# EAGLE board Noduino-Open-Plug-V0.8-Produce (EAGLE 6.6.0)
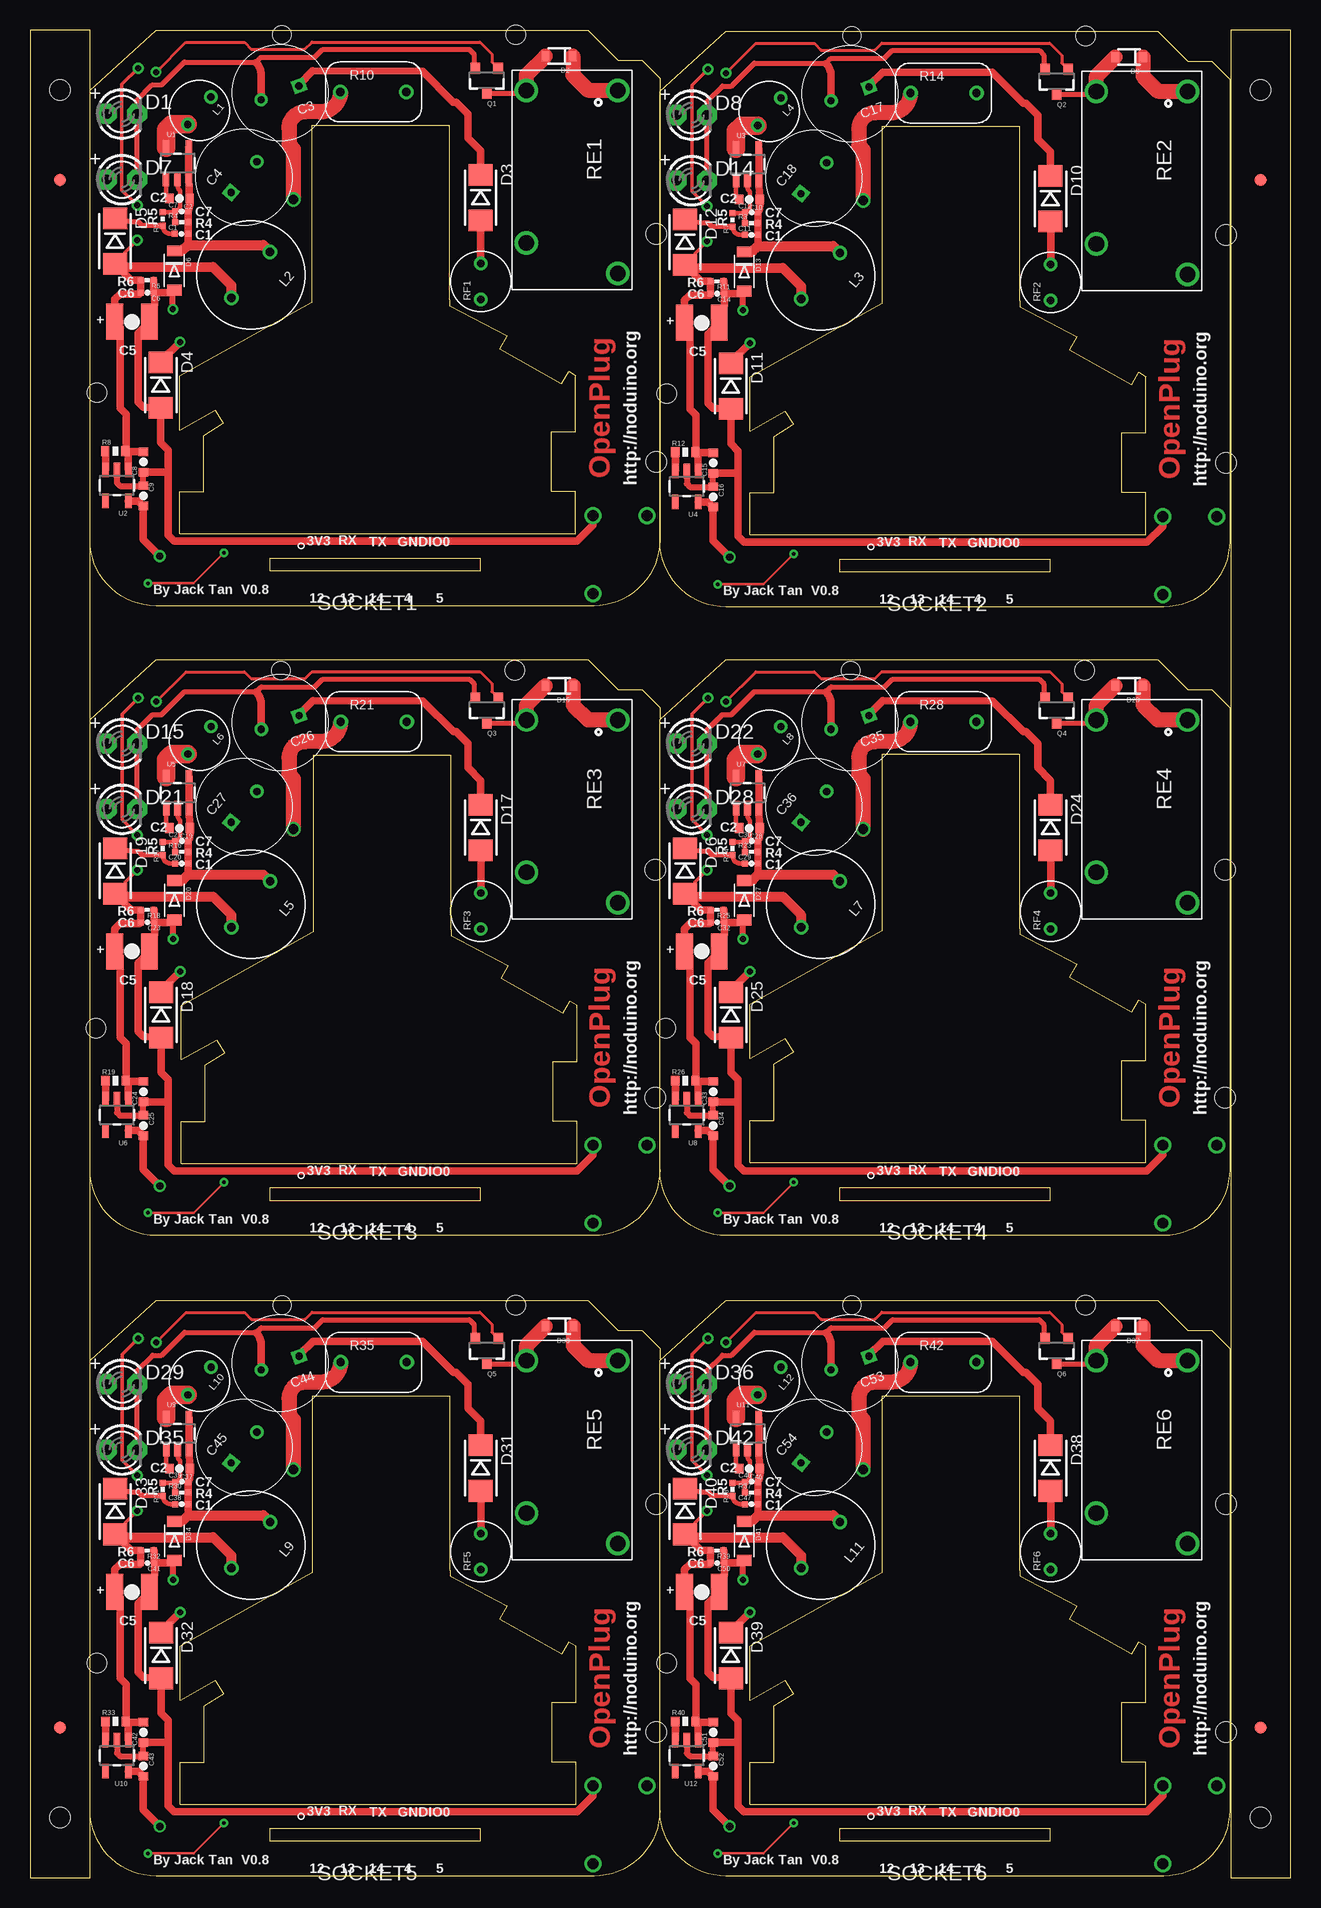
[diagram p0: board, top side]
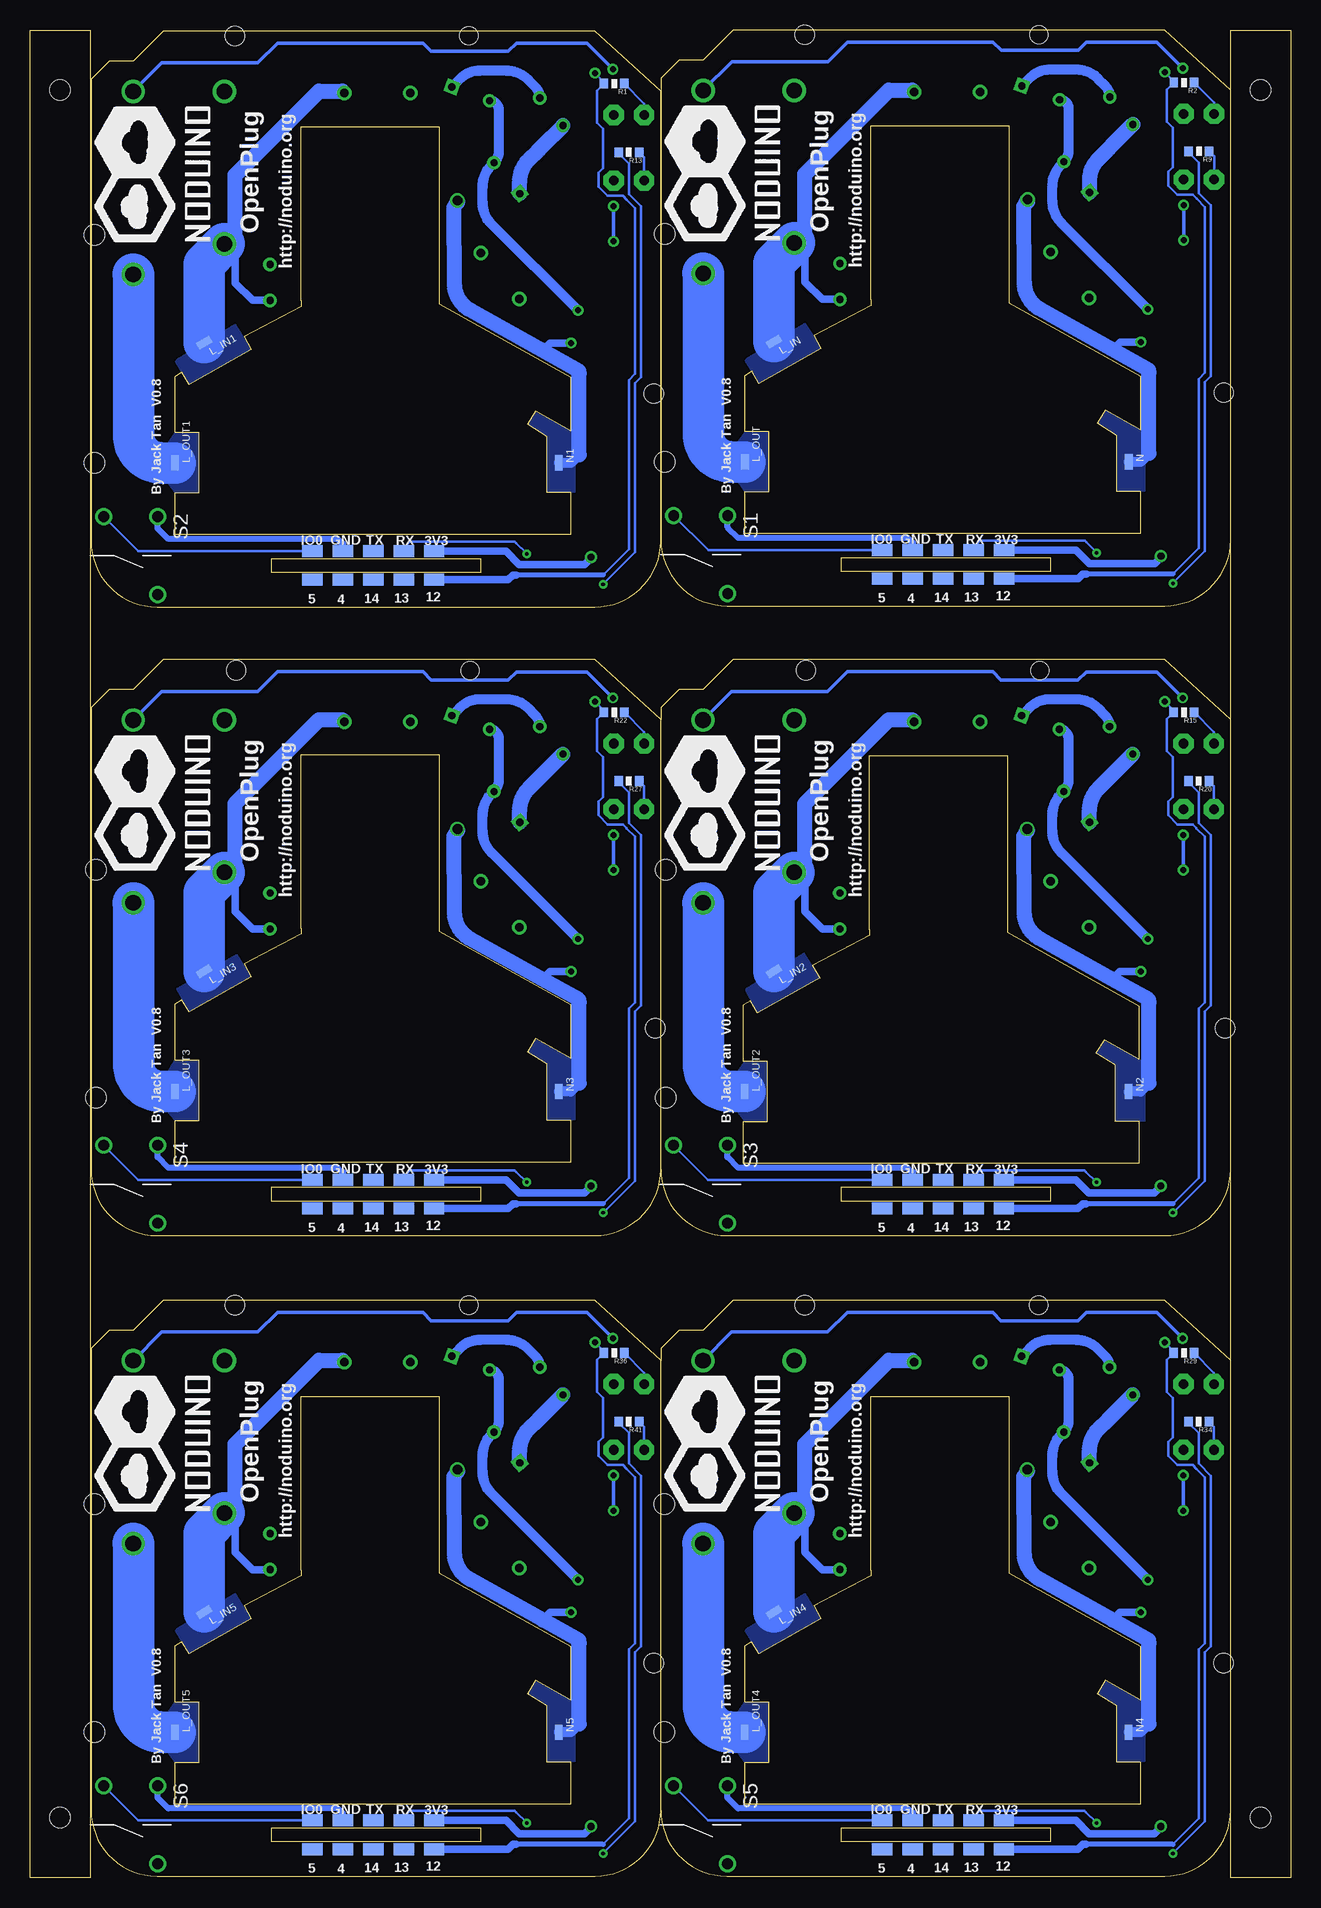
[diagram p1: board, bottom side, seen from below]

Size 105.1 x 154 mm. Coordinates in mm from the lower left corner, seen from the top.
Outline: 52.51,96.52 52.51,97.52 51.01,99.02 49.01,99.02 46.51,101.52 10.51,101.52 5.01,96.52 5.01,59.02 arc90 10.51,53.52 47.01,53.52 arc90 52.51,59.02
Outline: 52.51,59.02 arc90 58.01,53.52 94.51,53.52 arc90 100.01,59.02 100.01,97.52 98.51,99.02 96.51,99.02 94.01,101.52 58.01,101.52 52.51,96.52
Outline: 52.51,59.02 52.51,96.52
Outline: 52.51,43.12 52.51,44.12 51.01,45.62 49.01,45.62 46.51,48.12 10.51,48.12 5.01,43.12 5.01,5.61 arc90 10.51,0.11 47.01,0.11 arc90 52.51,5.61
Outline: 52.51,5.61 arc90 58.01,0.11 94.51,0.11 arc90 100.01,5.61 100.01,44.12 98.51,45.62 96.51,45.62 94.01,48.12 58.01,48.12 52.51,43.12
Outline: 52.51,5.61 52.51,43.12
Outline: 52.5,150 52.5,111.5 arc-90 47,106 10.5,106 arc-90 5,111.5 5,149 10.5,154 46.5,154 49,151.5 51,151.5 52.5,150
Outline: 100.01,149.91 100.01,111.42 arc-90 94.51,105.92 58.01,105.92 arc-90 52.51,111.42 52.51,148.91 58.01,153.91 94.01,153.91 96.51,151.41 98.51,151.41 100.01,149.91
Outline: 0,154 0,0 5,0 5,154 0,154
Outline: 100.1,154 100.1,0 105.1,0 105.1,154 100.1,154
Copper layers (1*16): Top 0.035mm / dielectric 1.5mm / Bottom 0.035mm
Design rules "default": minimum track width 10mil, minimum drill 24mil, track to track 8mil, track to pad 8mil, pad to pad 8mil, via to via 8mil, smd to smd 8mil, copper to edge 40mil, drill to drill 8mil, minimum pad ring 10mil, minimum via ring 8mil, stop-mask expansion 4mil, vias tented up to drill 0mil, thermal gap 10mil
Holes 1.5 mm at 21,153.6 68.51,153.51 20.91,100.61 68.41,100.61 21.01,47.72 68.51,47.72
Holes 1.6 mm at 40.5,153.6 5.58,123.77 88.01,153.51 53.09,123.69 40.41,100.61 5.49,70.79 87.91,100.61 52.99,70.79 40.51,47.72 5.59,17.89 88.01,47.72 53.09,17.89
Holes 1.7 mm at 52.2,137 52.2,118 99.71,136.91 99.71,117.91 52.11,84.02 52.11,65.02 99.61,84.02 99.61,65.02 52.21,31.11 52.21,12.11 99.71,31.11 99.71,12.11 2.5,149 2.5,5 102.6,149 102.6,5
Milling: 150 lines

## Footprints (pad centres in the part's own frame; a part is rotated, then mirrored left to right if it is on the bottom)
0402-CAP = smd 0.5 x 0.5: 1 -0.55,0; 2 0.55,0
0603-CAP = smd 0.7 x 0.8: 1 -0.85,0; 2 0.85,0
CPOL-RADIOA-3.3UF-400V = drill 0.6 square: P$1 -1.675,0 | drill 0.6: P$2 1.675,0
B3528-CAP = smd 1.4 x 3: 1 -1.45,0; 2 1.45,0
LED3MM = drill 0.813 pad 1.676 octagon: A -1.27,0; K 1.27,0
SOD-323 = smd 0.63 x 0.83: 1 -1.15,0; 2 1.15,0
DO-214 = smd 1.8 x 2: A 1.9,0; C -1.9,0
SOD-123 = smd 0.91 x 1.22: A 1.637,0; C -1.637,0
MARK-1MM = smd 1 x 1: P$1 0,0
3-0.5-5 = drill 0.6: P$1 -1.5,0; P$2 1.5,0
INDUCTOR-5-0.5 = drill 0.7: P$1 -2.5,0; P$2 2.5,0
1SMD = smd 1.27 x 0.635: 1 0,0
SOT23-3 = smd 0.8 x 0.9: 1 -0.95,-1; 2 0.95,-1; 3 0,1.1
0603-RES = smd 0.7 x 0.8: 1 -0.85,0; 2 0.85,0
0402-RES = smd 0.5 x 0.5: 1 -0.55,0; 2 0.55,0
07D471K = drill 0.7: P$1 -2.75,0; P$2 2.75,0
HKE-HRS3FN = drill 1.3: 1 0,7.6; 2 0,0; 3 12.7,0; 4 15.24,7.6
SWITCH-TS-037-PLUG = drill 0.9: P$1 -3.25,2.25; P$2 3.25,2.25; P$3 -3.25,-2.25
MOD-PLUG-SOCKET = smd 1.7 x 1 bottom: 1 13.6,-1.14; 2 11.06,-1.14; 3 8.52,-1.14; 4 5.98,-1.14; 5 3.44,-1.14; 6 3.44,1.24; 7 5.98,1.24; 8 8.52,1.24; 9 11.06,1.24; 10 13.6,1.24
SOT23-5 = smd 0.55 x 1.2: 1 -0.95,-1.3; 2 0,-1.3; 3 0.95,-1.3; 4 0.95,1.3; 5 -0.95,1.3

## Placement (x,y rotation side)
C1  220nF  [0402-CAP]  12.63,137.01 0 top
C2  2.2uF  [0603-CAP]  12.46,139.96 180 top
C3  400V/3.3uF  [CPOL-RADIOA-3.3UF-400V]  20.85,148.76 200 top
C4  400V/3.3uF  [CPOL-RADIOA-3.3UF-400V]  17.84,141.73 50 top
C5  100uF/6.3V  [B3528-CAP]  8.51,129.68 180 top
C6  1uF  [0402-CAP]  9.78,132.11 180 top
C7  470pF  [0402-CAP]  12.65,138.88 0 top
C8  4.7uF  [0603-CAP]  9.46,117.99 90 top
C9  4.7uF  [0603-CAP]  9.45,115.17 270 top
C10  2.2uF  [0603-CAP]  59.97,139.88 180 top
C11  220nF  [0402-CAP]  60.14,136.92 0 top
C12  470pF  [0402-CAP]  60.16,138.8 0 top
C13  100uF/6.3V  [B3528-CAP]  56.02,129.59 180 top
C14  1uF  [0402-CAP]  57.29,132.02 180 top
C15  4.7uF  [0603-CAP]  56.97,117.9 90 top
C16  4.7uF  [0603-CAP]  56.96,115.09 270 top
C17  400V/3.3uF  [CPOL-RADIOA-3.3UF-400V]  68.36,148.68 200 top
C18  400V/3.3uF  [CPOL-RADIOA-3.3UF-400V]  65.35,141.65 50 top
C19  2.2uF  [0603-CAP]  12.47,87.48 180 top
C20  220nF  [0402-CAP]  12.64,84.52 0 top
C21  470pF  [0402-CAP]  12.66,86.4 0 top
C22  100uF/6.3V  [B3528-CAP]  8.52,77.19 180 top
C23  1uF  [0402-CAP]  9.79,79.62 180 top
C24  4.7uF  [0603-CAP]  9.47,65.5 90 top
C25  4.7uF  [0603-CAP]  9.46,62.69 270 top
C26  400V/3.3uF  [CPOL-RADIOA-3.3UF-400V]  20.86,96.28 200 top
C27  400V/3.3uF  [CPOL-RADIOA-3.3UF-400V]  17.85,89.25 50 top
C28  2.2uF  [0603-CAP]  59.97,87.48 180 top
C29  220nF  [0402-CAP]  60.14,84.52 0 top
C30  470pF  [0402-CAP]  60.16,86.4 0 top
C31  100uF/6.3V  [B3528-CAP]  56.02,77.19 180 top
C32  1uF  [0402-CAP]  57.29,79.62 180 top
C33  4.7uF  [0603-CAP]  56.97,65.5 90 top
C34  4.7uF  [0603-CAP]  56.96,62.69 270 top
C35  400V/3.3uF  [CPOL-RADIOA-3.3UF-400V]  68.36,96.28 200 top
C36  400V/3.3uF  [CPOL-RADIOA-3.3UF-400V]  65.35,89.25 50 top
C37  2.2uF  [0603-CAP]  12.47,34.08 180 top
C38  220nF  [0402-CAP]  12.64,31.12 0 top
C39  470pF  [0402-CAP]  12.66,33 0 top
C40  100uF/6.3V  [B3528-CAP]  8.52,23.79 180 top
C41  1uF  [0402-CAP]  9.79,26.22 180 top
C42  4.7uF  [0603-CAP]  9.47,12.1 90 top
C43  4.7uF  [0603-CAP]  9.46,9.29 270 top
C44  400V/3.3uF  [CPOL-RADIOA-3.3UF-400V]  20.86,42.88 200 top
C45  400V/3.3uF  [CPOL-RADIOA-3.3UF-400V]  17.85,35.85 50 top
C46  2.2uF  [0603-CAP]  59.97,34.08 180 top
C47  220nF  [0402-CAP]  60.14,31.12 0 top
C48  470pF  [0402-CAP]  60.16,33 0 top
C49  100uF/6.3V  [B3528-CAP]  56.02,23.79 180 top
C50  1uF  [0402-CAP]  57.29,26.22 180 top
C51  4.7uF  [0603-CAP]  56.97,12.1 90 top
C52  4.7uF  [0603-CAP]  56.96,9.29 270 top
C53  400V/3.3uF  [CPOL-RADIOA-3.3UF-400V]  68.36,42.88 200 top
C54  400V/3.3uF  [CPOL-RADIOA-3.3UF-400V]  65.35,35.85 50 top
D1  RED  [LED3MM]  7.66,147.01 0 top
D2  1N4007  [SOD-323]  44.12,151.83 180 top
D3  1N4007  [DO-214]  37.56,140.01 270 top
D4  1N4007  [DO-214]  10.91,124.39 270 top
D5  1N4007  [DO-214]  7.09,136.39 270 top
D6  T7  [SOD-123]  12.03,133.95 270 top
D7  RED  [LED3MM]  7.66,141.54 0 top
D8  RED  [LED3MM]  55.17,146.92 0 top
D9  1N4007  [SOD-323]  91.63,151.75 180 top
D10  1N4007  [DO-214]  85.07,139.93 270 top
D11  1N4007  [DO-214]  58.42,124.3 270 top
D12  1N4007  [DO-214]  54.6,136.31 270 top
D13  T7  [SOD-123]  59.54,133.86 270 top
D14  RED  [LED3MM]  55.17,141.45 0 top
D15  RED  [LED3MM]  7.67,94.52 0 top
D16  1N4007  [SOD-323]  44.13,99.35 180 top
D17  1N4007  [DO-214]  37.57,87.53 270 top
D18  1N4007  [DO-214]  10.92,71.9 270 top
D19  1N4007  [DO-214]  7.1,83.91 270 top
D20  T7  [SOD-123]  12.04,81.46 270 top
D21  RED  [LED3MM]  7.67,89.05 0 top
D22  RED  [LED3MM]  55.17,94.52 0 top
D23  1N4007  [SOD-323]  91.63,99.35 180 top
D24  1N4007  [DO-214]  85.07,87.53 270 top
D25  1N4007  [DO-214]  58.42,71.9 270 top
D26  1N4007  [DO-214]  54.6,83.91 270 top
D27  T7  [SOD-123]  59.54,81.46 270 top
D28  RED  [LED3MM]  55.17,89.05 0 top
D29  RED  [LED3MM]  7.67,41.12 0 top
D30  1N4007  [SOD-323]  44.13,45.95 180 top
D31  1N4007  [DO-214]  37.57,34.13 270 top
D32  1N4007  [DO-214]  10.92,18.5 270 top
D33  1N4007  [DO-214]  7.1,30.51 270 top
D34  T7  [SOD-123]  12.04,28.06 270 top
D35  RED  [LED3MM]  7.67,35.65 0 top
D36  RED  [LED3MM]  55.17,41.12 0 top
D37  1N4007  [SOD-323]  91.63,45.95 180 top
D38  1N4007  [DO-214]  85.07,34.13 270 top
D39  1N4007  [DO-214]  58.42,18.5 270 top
D40  1N4007  [DO-214]  54.6,30.51 270 top
D41  T7  [SOD-123]  59.54,28.06 270 top
D42  RED  [LED3MM]  55.17,35.65 0 top
E$1  [MARK-1MM]  2.5,141.5 0 top
E$2  [MARK-1MM]  2.5,12.5 0 top
E$3  [MARK-1MM]  102.6,141.5 0 top
E$4  [MARK-1MM]  102.6,12.5 0 top
L1  1mH  [3-0.5-5]  14.12,147.27 230 top
L2  1mH  [INDUCTOR-5-0.5]  18.4,133.6 230 top
L3  1mH  [INDUCTOR-5-0.5]  65.91,133.51 230 top
L4  1mH  [3-0.5-5]  61.63,147.19 230 top
L5  1mH  [INDUCTOR-5-0.5]  18.41,81.11 230 top
L6  1mH  [3-0.5-5]  14.13,94.79 230 top
L7  1mH  [INDUCTOR-5-0.5]  65.91,81.11 230 top
L8  1mH  [3-0.5-5]  61.63,94.79 230 top
L9  1mH  [INDUCTOR-5-0.5]  18.41,27.71 230 top
L10  1mH  [3-0.5-5]  14.13,41.39 230 top
L11  1mH  [INDUCTOR-5-0.5]  65.91,27.71 230 top
L12  1mH  [3-0.5-5]  61.63,41.39 230 top
L_IN  TESTPAD50/25  [1SMD]  43.06,128.02 31 bottom
L_IN1  TESTPAD50/25  [1SMD]  90.57,127.93 31 bottom
L_IN2  TESTPAD50/25  [1SMD]  43.07,75.53 31 bottom
L_IN3  TESTPAD50/25  [1SMD]  90.57,75.53 31 bottom
L_IN4  TESTPAD50/25  [1SMD]  43.07,22.13 31 bottom
L_IN5  TESTPAD50/25  [1SMD]  90.57,22.13 31 bottom
L_OUT  TESTPAD50/25  [1SMD]  45.5,118 90 bottom
L_OUT1  TESTPAD50/25  [1SMD]  93.01,117.91 90 bottom
L_OUT2  TESTPAD50/25  [1SMD]  45.51,65.52 90 bottom
L_OUT3  TESTPAD50/25  [1SMD]  93.01,65.52 90 bottom
L_OUT4  TESTPAD50/25  [1SMD]  45.51,12.11 90 bottom
L_OUT5  TESTPAD50/25  [1SMD]  93.01,12.11 90 bottom
N  TESTPAD50/25  [1SMD]  13.5,118 90 bottom
N1  TESTPAD50/25  [1SMD]  61.01,117.91 90 bottom
N2  TESTPAD50/25  [1SMD]  13.51,65.52 90 bottom
N3  TESTPAD50/25  [1SMD]  61.01,65.52 90 bottom
N4  TESTPAD50/25  [1SMD]  13.51,12.11 90 bottom
N5  TESTPAD50/25  [1SMD]  61.01,12.11 90 bottom
Q1  SI2302  [SOT23-3]  38.07,149.81 180 top
Q2  SI2302  [SOT23-3]  85.58,149.73 180 top
Q3  SI2302  [SOT23-3]  38.08,97.33 180 top
Q4  SI2302  [SOT23-3]  85.58,97.33 180 top
Q5  SI2302  [SOT23-3]  38.08,43.93 180 top
Q6  SI2302  [SOT23-3]  85.58,43.93 180 top
R1  1K  [0603-RES]  56.41,149.53 180 bottom
R2  1K  [0603-RES]  8.9,149.62 180 bottom
R3  4.99K  [0402-RES]  60.16,137.9 0 top
R4  4.99K  [0402-RES]  12.65,137.98 0 top
R5  4.99K  [0402-RES]  11.06,138.25 90 top
R6  680R  [0402-RES]  9.77,133.14 180 top
R7  4.99K  [0402-RES]  58.57,138.16 90 top
R8  10K  [0603-RES]  7.12,118.9 0 top
R9  1K  [0603-RES]  7.66,143.88 180 bottom
R10  07D471K  [07D471K]  28.64,148.83 0 top
R11  680R  [0402-RES]  57.28,133.06 180 top
R12  10K  [0603-RES]  54.63,118.81 0 top
R13  1K  [0603-RES]  55.17,143.8 180 bottom
R14  07D471K  [07D471K]  76.15,148.75 0 top
R15  1K  [0603-RES]  8.91,97.13 180 bottom
R16  4.99K  [0402-RES]  12.66,85.5 0 top
R17  4.99K  [0402-RES]  11.07,85.76 90 top
R18  680R  [0402-RES]  9.78,80.66 180 top
R19  10K  [0603-RES]  7.13,66.41 0 top
R20  1K  [0603-RES]  7.67,91.4 180 bottom
R21  07D471K  [07D471K]  28.65,96.35 0 top
R22  1K  [0603-RES]  56.41,97.13 180 bottom
R23  4.99K  [0402-RES]  60.16,85.5 0 top
R24  4.99K  [0402-RES]  58.57,85.76 90 top
R25  680R  [0402-RES]  57.28,80.66 180 top
R26  10K  [0603-RES]  54.63,66.41 0 top
R27  1K  [0603-RES]  55.17,91.4 180 bottom
R28  07D471K  [07D471K]  76.15,96.35 0 top
R29  1K  [0603-RES]  8.91,43.73 180 bottom
R30  4.99K  [0402-RES]  12.66,32.1 0 top
R31  4.99K  [0402-RES]  11.07,32.36 90 top
R32  680R  [0402-RES]  9.78,27.26 180 top
R33  10K  [0603-RES]  7.13,13.01 0 top
R34  1K  [0603-RES]  7.67,38 180 bottom
R35  07D471K  [07D471K]  28.65,42.95 0 top
R36  1K  [0603-RES]  56.41,43.73 180 bottom
R37  4.99K  [0402-RES]  60.16,32.1 0 top
R38  4.99K  [0402-RES]  58.57,32.36 90 top
R39  680R  [0402-RES]  57.28,27.26 180 top
R40  10K  [0603-RES]  54.63,13.01 0 top
R41  1K  [0603-RES]  55.17,38 180 bottom
R42  07D471K  [07D471K]  76.15,42.95 0 top
RE1  HRS3FNH  [HKE-HRS3FN]  41.39,148.96 270 top
RE2  HRS3FNH  [HKE-HRS3FN]  88.9,148.88 270 top
RE3  HRS3FNH  [HKE-HRS3FN]  41.4,96.48 270 top
RE4  HRS3FNH  [HKE-HRS3FN]  88.9,96.48 270 top
RE5  HRS3FNH  [HKE-HRS3FN]  41.4,43.08 270 top
RE6  HRS3FNH  [HKE-HRS3FN]  88.9,43.08 270 top
RF1  10R  [3-0.5-5]  37.58,133.04 90 top
RF2  10R  [3-0.5-5]  85.09,132.96 90 top
RF3  10R  [3-0.5-5]  37.59,80.56 90 top
RF4  10R  [3-0.5-5]  85.09,80.56 90 top
RF5  10R  [3-0.5-5]  37.59,27.16 90 top
RF6  10R  [3-0.5-5]  85.09,27.16 90 top
S1  [SWITCH-TS-037-PLUG]  49.19,110.28 270 bottom
S2  [SWITCH-TS-037-PLUG]  96.7,110.19 270 bottom
S3  [SWITCH-TS-037-PLUG]  49.2,57.79 270 bottom
S4  [SWITCH-TS-037-PLUG]  96.7,57.79 270 bottom
S5  [SWITCH-TS-037-PLUG]  49.2,4.39 270 bottom
S6  [SWITCH-TS-037-PLUG]  96.7,4.39 270 bottom
SOCKET1  [MOD-PLUG-SOCKET]  37.5,109.5 180 top
SOCKET2  [MOD-PLUG-SOCKET]  85.01,109.42 180 top
SOCKET3  [MOD-PLUG-SOCKET]  37.51,57.02 180 top
SOCKET4  [MOD-PLUG-SOCKET]  85.01,57.02 180 top
SOCKET5  [MOD-PLUG-SOCKET]  37.51,3.61 180 top
SOCKET6  [MOD-PLUG-SOCKET]  85.01,3.61 180 top
U1  F7298  [SOT23-5]  12.3,142.89 0 top
U2  AP2112  [SOT23-5]  7.24,116.05 180 top
U3  F7298  [SOT23-5]  59.81,142.81 0 top
U4  AP2112  [SOT23-5]  54.75,115.96 180 top
U5  F7298  [SOT23-5]  12.31,90.41 0 top
U6  AP2112  [SOT23-5]  7.25,63.56 180 top
U7  F7298  [SOT23-5]  59.81,90.41 0 top
U8  AP2112  [SOT23-5]  54.75,63.56 180 top
U9  F7298  [SOT23-5]  12.31,37.01 0 top
U10  AP2112  [SOT23-5]  7.25,10.16 180 top
U11  F7298  [SOT23-5]  59.81,37.01 0 top
U12  AP2112  [SOT23-5]  54.75,10.16 180 top
U$1  NODUINO-LOGO-ALL  [NODUINO-ALL-1]  41.92,136.06 90 bottom
U$2  NODUINO-LOGO-ALL  [NODUINO-ALL-1]  89.43,135.97 90 bottom
U$3  NODUINO-LOGO-ALL  [NODUINO-ALL-1]  41.93,83.57 90 bottom
U$4  NODUINO-LOGO-ALL  [NODUINO-ALL-1]  89.43,83.57 90 bottom
U$5  NODUINO-LOGO-ALL  [NODUINO-ALL-1]  41.93,30.17 90 bottom
U$6  NODUINO-LOGO-ALL  [NODUINO-ALL-1]  89.43,30.17 90 bottom

## Library data of the parts
C1-C54 D2-D6 D9-D13 D16-D20 D23-D27 D30-D34 D37-D41 E$1-E$4 L1-L12 L_IN L_IN1-L_IN5 L_OUT L_OUT1-L_OUT5 N N1-N5 Q1-Q6 R1-R42 RE1-RE6 RF1-RF6 S1-S6 SOCKET1-SOCKET6 U1-U12 U$1-U$6 = ehl
D1 D7 D8 D14 D15 D21 D22 D28 D29 D35 D36 D42 = adafruit

## Nets
3V1: C16.2 SOCKET2.1 U4.5
3V2: C25.2 SOCKET3.1 U6.5
3V3: C9.2 SOCKET1.1 U2.5
3V4: C34.2 SOCKET4.1 U8.5
3V5: C43.2 SOCKET5.1 U10.5
3V6: C52.2 SOCKET6.1 U12.5
5V: C5.2 C6.2 C8.2 D2.1 D5.A L2.P$2 R6.2 R8.2 RE1.1 U2.1
5V1: C13.2 C14.2 C15.2 D9.1 D12.A L3.P$2 R11.2 R12.2 RE2.1 U4.1
5V2: C22.2 C23.2 C24.2 D16.1 D19.A L5.P$2 R18.2 R19.2 RE3.1 U6.1
5V3: C31.2 C32.2 C33.2 D23.1 D26.A L7.P$2 R25.2 R26.2 RE4.1 U8.1
5V4: C40.2 C41.2 C42.2 D30.1 D33.A L9.P$2 R32.2 R33.2 RE5.1 U10.1
5V5: C49.2 C50.2 C51.2 D37.1 D40.A L11.P$2 R39.2 R40.2 RE6.1 U12.1
GND: C3.P$2 C4.P$2 C5.1 C6.1 C8.1 C9.1 D1.K D4.A D6.A D7.K Q1.2 R6.1 S1.P$1 SOCKET1.4 U2.2
GND1: C13.1 C14.1 C15.1 C16.1 C17.P$2 C18.P$2 D8.K D11.A D13.A D14.K Q2.2 R11.1 S2.P$1 SOCKET2.4 U4.2
GND2: C22.1 C23.1 C24.1 C25.1 C26.P$2 C27.P$2 D15.K D18.A D20.A D21.K Q3.2 R18.1 S3.P$1 SOCKET3.4 U6.2
GND3: C31.1 C32.1 C33.1 C34.1 C35.P$2 C36.P$2 D22.K D25.A D27.A D28.K Q4.2 R25.1 S4.P$1 SOCKET4.4 U8.2
GND4: C40.1 C41.1 C42.1 C43.1 C44.P$2 C45.P$2 D29.K D32.A D34.A D35.K Q5.2 R32.1 S5.P$1 SOCKET5.4 U10.2
GND5: C49.1 C50.1 C51.1 C52.1 C53.P$2 C54.P$2 D36.K D39.A D41.A D42.K Q6.2 R39.1 S6.P$1 SOCKET6.4 U12.2
GPIO0: S1.P$3 SOCKET1.5
GPIO1: R13.2 SOCKET2.2
GPIO2: S2.P$3 SOCKET2.5
GPIO3: R9.2 SOCKET1.2
GPIO4: R20.2 SOCKET3.2
GPIO5: S3.P$3 SOCKET3.5
GPIO6: R27.2 SOCKET4.2
GPIO7: S4.P$3 SOCKET4.5
GPIO8: R34.2 SOCKET5.2
GPIO9: S5.P$3 SOCKET5.5
GPIO10: R41.2 SOCKET6.2
GPIO11: S6.P$3 SOCKET6.5
L_IN: L_IN.1 R10.P$2 RE1.3 RF1.P$1
L_IN1: L_IN1.1 R14.P$2 RE2.3 RF2.P$1
L_IN2: L_IN2.1 R21.P$2 RE3.3 RF3.P$1
L_IN3: L_IN3.1 R28.P$2 RE4.3 RF4.P$1
L_IN4: L_IN4.1 R35.P$2 RE5.3 RF5.P$1
L_IN5: L_IN5.1 R42.P$2 RE6.3 RF6.P$1
L_OUT: L_OUT.1 RE1.4
L_OUT1: L_OUT1.1 RE2.4
L_OUT2: L_OUT2.1 RE3.4
L_OUT3: L_OUT3.1 RE4.4
L_OUT4: L_OUT4.1 RE5.4
L_OUT5: L_OUT5.1 RE6.4
N: D4.C N.1 R10.P$1
N1: D11.C N1.1 R14.P$1
N2: D18.C N2.1 R21.P$1
N3: D25.C N3.1 R28.P$1
N4: D32.C N4.1 R35.P$1
N5: D39.C N5.1 R42.P$1
N$1: D8.A R1.1
N$2: D2.2 Q1.3 RE1.2
N$3: C3.P$1 D3.C L1.P$1
N$4: D1.A R2.1
N$5: C4.P$1 L1.P$2 U1.5
N$6: C1.2 C2.1 C7.2 D6.C L2.P$1 R4.2 U1.3 U1.4
N$7: D3.A RF1.P$2
N$8: D9.2 Q2.3 RE2.2
N$9: C17.P$1 D10.C L4.P$1
N$10: C2.2 U1.1
N$11: C7.1 R4.1 R5.2 U1.2
N$12: C1.1 D5.C R5.1
N$13: R8.1 U2.3
N$14: D7.A R9.1
N$15: C18.P$1 L4.P$2 U3.5
N$16: C10.1 C11.2 C12.2 D13.C L3.P$1 R3.2 U3.3 U3.4
N$17: D10.A RF2.P$2
N$18: C10.2 U3.1
N$19: C12.1 R3.1 R7.2 U3.2
N$20: C11.1 D12.C R7.1
N$21: R12.1 U4.3
N$22: D14.A R13.1
N$23: D15.A R15.1
N$24: D16.2 Q3.3 RE3.2
N$25: C26.P$1 D17.C L6.P$1
N$26: C27.P$1 L6.P$2 U5.5
N$27: C19.1 C20.2 C21.2 D20.C L5.P$1 R16.2 U5.3 U5.4
N$28: D17.A RF3.P$2
N$29: C19.2 U5.1
N$30: C21.1 R16.1 R17.2 U5.2
N$31: C20.1 D19.C R17.1
N$32: R19.1 U6.3
N$33: D21.A R20.1
N$34: D22.A R22.1
N$35: D23.2 Q4.3 RE4.2
N$36: C35.P$1 D24.C L8.P$1
N$37: C36.P$1 L8.P$2 U7.5
N$38: C28.1 C29.2 C30.2 D27.C L7.P$1 R23.2 U7.3 U7.4
N$39: D24.A RF4.P$2
N$40: C28.2 U7.1
N$41: C30.1 R23.1 R24.2 U7.2
N$42: C29.1 D26.C R24.1
N$43: R26.1 U8.3
N$44: D28.A R27.1
N$45: D29.A R29.1
N$46: D30.2 Q5.3 RE5.2
N$47: C44.P$1 D31.C L10.P$1
N$48: C45.P$1 L10.P$2 U9.5
N$49: C37.1 C38.2 C39.2 D34.C L9.P$1 R30.2 U9.3 U9.4
N$50: D31.A RF5.P$2
N$51: C37.2 U9.1
N$52: C39.1 R30.1 R31.2 U9.2
N$53: C38.1 D33.C R31.1
N$54: R33.1 U10.3
N$55: D35.A R34.1
N$56: D36.A R36.1
N$57: D37.2 Q6.3 RE6.2
N$58: C53.P$1 D38.C L12.P$1
N$59: C54.P$1 L12.P$2 U11.5
N$60: C46.1 C47.2 C48.2 D41.C L11.P$1 R37.2 U11.3 U11.4
N$61: D38.A RF6.P$2
N$62: C46.2 U11.1
N$63: C48.1 R37.1 R38.2 U11.2
N$64: C47.1 D40.C R38.1
N$65: R40.1 U12.3
N$66: D42.A R41.1
RELAY: Q1.1 R2.2 SOCKET1.10
RELAY1: Q2.1 R1.2 SOCKET2.10
RELAY2: Q3.1 R15.2 SOCKET3.10
RELAY3: Q4.1 R22.2 SOCKET4.10
RELAY4: Q5.1 R29.2 SOCKET5.10
RELAY5: Q6.1 R36.2 SOCKET6.10
TX: SOCKET1.3
TX1: SOCKET2.3
TX2: SOCKET3.3
TX3: SOCKET4.3
TX4: SOCKET5.3
TX5: SOCKET6.3

## Tracks (layer width: path | path; a pad name or v marks a point on that pad's centre or on a via)
3V1  (via drill 0.6)
  Top 0.61: U4.5 56.53,114.66 C16.2 56.96,111.43 v58.33,110.06
  Bottom 0.61: v58.33,110.06 58.33,109.98 58.85,109.45 64.31,109.45 65.41,110.56 SOCKET2.1
3V2  (via drill 0.6)
  Top 0.61: U6.5 9.03,62.26 C25.2 9.46,59.03 v10.83,57.66
  Bottom 0.61: v10.83,57.66 10.83,57.58 11.35,57.05 16.81,57.05 17.91,58.16 SOCKET3.1
3V3  (via drill 0.6)
  Top 0.61: U2.5 9.02,114.75 C9.2 9.45,111.51 v10.82,110.14
  Bottom 0.61: v10.82,110.14 10.82,110.07 11.34,109.54 16.8,109.54 17.9,110.64 SOCKET1.1
3V4  (via drill 0.6)
  Top 0.61: U8.5 56.53,62.26 C34.2 56.96,59.03 v58.33,57.66
  Bottom 0.61: v58.33,57.66 58.33,57.58 58.85,57.05 64.31,57.05 65.41,58.16 SOCKET4.1
3V5  (via drill 0.6)
  Top 0.61: U10.5 9.03,8.86 C43.2 9.46,5.63 v10.83,4.26
  Bottom 0.61: v10.83,4.26 10.83,4.18 11.35,3.66 16.81,3.66 17.91,4.75 SOCKET5.1
3V6  (via drill 0.6)
  Top 0.61: U12.5 56.53,8.86 C52.2 56.96,5.63 v58.33,4.26
  Bottom 0.61: v58.33,4.26 58.33,4.18 58.85,3.66 64.31,3.66 65.41,4.75 SOCKET6.1
5V  (via drill 0.5)
  Top 0.305: D5.A 7.15,134.43 7.4,134.25 7.91,134.69 7.91,135.45 v8.93,136.46 | v8.93,139.39 7.66,140.66 7.66,149.47 v9.01,150.81
  Top 0.61: U2.1 8.2,118.67 R8.2 | C8.2 8.03,118.84 R8.2 | R8.2 8,118.93 8,122 7.5,122.5 7.5,129.24 C5.2 7.05,131.56 7.5,132 9.12,132 C6.2 9.23,133.13 R6.2 8.44,133.14 D5.A
  Top 0.813: L2.P$2 16.8,132.7 15.26,134.24 7.4,134.25
  Top 1.27: D2.1 45.27,150.23 46.5,149 48.95,149 RE1.1
  Bottom 0.305: RE1.1 46.6,151.35 38.59,151.35 36.94,153 24.84,153 24.14,152.3 17.72,152.3 17.05,152.97 11.16,152.97 v9.01,150.81 | v8.93,136.46 v8.93,139.39
5V1  (via drill 0.5)
  Top 0.305: D12.A 54.66,134.35 54.91,134.17 55.42,134.6 55.42,135.36 v56.44,136.38 | v56.44,139.31 55.17,140.58 55.17,149.38 v56.52,150.73
  Top 0.61: U4.1 55.7,118.59 R12.2 | C15.2 55.54,118.75 R12.2 | R12.2 55.51,118.84 55.51,121.91 55.01,122.41 55.01,129.15 C13.2 54.56,131.47 55.01,131.91 56.63,131.91 C14.2 56.74,133.04 R11.2 55.95,133.06 D12.A
  Top 0.813: L3.P$2 64.31,132.62 62.77,134.16 54.91,134.17
  Top 1.27: D9.1 92.78,150.15 94.01,148.91 96.46,148.91 RE2.1
  Bottom 0.305: RE2.1 94.11,151.26 86.1,151.26 84.45,152.91 72.35,152.91 71.65,152.22 65.23,152.22 64.56,152.89 58.67,152.89 v56.52,150.73 | v56.44,136.38 v56.44,139.31
5V2  (via drill 0.5)
  Top 0.305: D19.A 7.16,81.95 7.41,81.77 7.92,82.2 7.92,82.96 v8.94,83.98 | v8.94,86.91 7.67,88.18 7.67,96.98 v9.02,98.33
  Top 0.61: U6.1 8.2,66.19 R19.2 | C24.2 8.04,66.35 R19.2 | R19.2 8.01,66.44 8.01,69.52 7.51,70.02 7.51,76.75 C22.2 7.06,79.07 7.51,79.52 9.13,79.52 C23.2 9.24,80.64 R18.2 8.45,80.66 D19.A
  Top 0.813: L5.P$2 16.81,80.22 15.27,81.76 7.41,81.77
  Top 1.27: D16.1 45.28,97.75 46.51,96.52 48.96,96.52 RE3.1
  Bottom 0.305: RE3.1 46.61,98.86 38.61,98.86 36.95,100.51 24.85,100.51 24.15,99.82 17.73,99.82 17.06,100.49 11.17,100.49 v9.02,98.33 | v8.94,83.98 v8.94,86.91
5V3  (via drill 0.5)
  Top 0.305: D26.A 54.66,81.95 54.91,81.77 55.42,82.2 55.42,82.96 v56.44,83.98 | v56.44,86.91 55.17,88.18 55.17,96.98 v56.52,98.33
  Top 0.61: U8.1 55.7,66.19 R26.2 | C33.2 55.54,66.35 R26.2 | R26.2 55.51,66.44 55.51,69.52 55.01,70.02 55.01,76.75 C31.2 54.56,79.07 55.01,79.52 56.63,79.52 C32.2 56.74,80.64 R25.2 55.95,80.66 D26.A
  Top 0.813: L7.P$2 64.31,80.22 62.77,81.76 54.91,81.77
  Top 1.27: D23.1 92.78,97.75 94.01,96.52 96.46,96.52 RE4.1
  Bottom 0.305: RE4.1 94.11,98.86 86.1,98.86 84.45,100.51 72.35,100.51 71.65,99.82 65.23,99.82 64.56,100.49 58.67,100.49 v56.52,98.33 | v56.44,83.98 v56.44,86.91
5V4  (via drill 0.5)
  Top 0.305: D33.A 7.16,28.55 7.41,28.37 7.92,28.8 7.92,29.56 v8.94,30.58 | v8.94,33.51 7.67,34.78 7.67,43.58 v9.02,44.93
  Top 0.61: U10.1 8.2,12.78 R33.2 | C42.2 8.04,12.95 R33.2 | R33.2 8.01,13.04 8.01,16.11 7.51,16.61 7.51,23.35 C40.2 7.06,25.67 7.51,26.11 9.13,26.11 C41.2 9.24,27.24 R32.2 8.45,27.25 D33.A
  Top 0.813: L9.P$2 16.81,26.82 15.27,28.36 7.41,28.37
  Top 1.27: D30.1 45.28,44.35 46.51,43.12 48.96,43.12 RE5.1
  Bottom 0.305: RE5.1 46.61,45.46 38.61,45.46 36.95,47.11 24.85,47.11 24.15,46.42 17.73,46.42 17.06,47.09 11.17,47.09 v9.02,44.93 | v8.94,30.58 v8.94,33.51
5V5  (via drill 0.5)
  Top 0.305: D40.A 54.66,28.55 54.91,28.37 55.42,28.8 55.42,29.56 v56.44,30.58 | v56.44,33.51 55.17,34.78 55.17,43.58 v56.52,44.93
  Top 0.61: U12.1 55.7,12.78 R40.2 | C51.2 55.54,12.95 R40.2 | R40.2 55.51,13.04 55.51,16.11 55.01,16.61 55.01,23.35 C49.2 54.56,25.67 55.01,26.11 56.63,26.11 C50.2 56.74,27.24 R39.2 55.95,27.25 D40.A
  Top 0.813: L11.P$2 64.31,26.82 62.77,28.36 54.91,28.37
  Top 1.27: D37.1 92.78,44.35 94.01,43.12 96.46,43.12 RE6.1
  Bottom 0.305: RE6.1 94.11,45.46 86.1,45.46 84.45,47.11 72.35,47.11 71.65,46.42 65.23,46.42 64.56,47.09 58.67,47.09 v56.52,44.93 | v56.44,30.58 v56.44,33.51
GND  (via drill 0.5)
  Top 0.305: 18.81,151.32 18.84,151.29 | 8.94,147 D1.K
  Top 0.406: 18.84,151.29 19.27,151.72 23.74,151.72 24.4,152.38 36.62,152.38 37,152 37,150.93 Q1.2 | D1.K 8.93,148.15 10.2,149.42 10.96,149.42 12.87,151.32 18.81,151.32 | 8.94,147 D7.K
  Top 0.508: U2.2 7.24,116.25 7.5,116 9.43,116 C9.1 9.45,117.12 C8.1 | v11.91,130.71 11.91,132.19 D6.A
  Top 0.61: 11.5,117 11.5,119 10.91,119.59 D4.A 9.42,122.58 9,123 9,128.72 C5.1 9.95,130.67 10.39,131.1 10.39,132.05 C6.1 | 11.5,117 11.5,111.88 12,111.38 45.61,111.38 46.94,112.71 S1.P$1 | C8.1 11.36,117.14 11.5,117 | C6.1 10.33,133.13 R6.1 | C6.1 11.83,132.11 D6.A | C3.P$2 19.27,150.25 arc45 18.84,151.29
  Bottom 0.508: 31.52,111.24 31.93,111.65 46.06,111.65 46.95,112.54 46.95,113.52
  Bottom 0.61: SOCKET1.4 31.52,111.24 | 46.95,113.52 S1.P$1
  Bottom 0.813: v11.91,130.71 19.11,137.91 arc45 19.86,139.71 19.86,141.02 arc45 19.11,142.81 C4.P$2 arc-45 18.5,144.01 18.5,147.42 arc-90 C3.P$2
GND1  (via drill 0.5)
  Top 0.305: 66.32,151.24 66.35,151.2 | D8.K
  Top 0.406: 66.35,151.2 66.78,151.63 71.25,151.63 71.91,152.29 84.13,152.29 84.51,151.91 84.51,150.84 Q2.2 | D8.K 56.44,148.06 57.71,149.33 58.47,149.33 60.38,151.24 66.32,151.24 | D8.K D14.K
  Top 0.508: U4.2 54.76,116.17 55.01,115.91 56.94,115.91 C16.1 56.96,117.04 C15.1 | v59.42,130.63 59.42,132.11 D13.A
  Top 0.61: 59.01,116.91 59.01,118.91 58.42,119.51 D11.A 56.93,122.49 56.51,122.91 56.51,128.64 C13.1 57.47,130.59 57.9,131.02 57.9,131.96 C14.1 | 59.01,116.91 59.01,111.8 59.51,111.3 93.12,111.3 94.45,112.62 S2.P$1 | C15.1 58.87,117.05 59.01,116.91 | C14.1 57.84,133.04 R11.1 | C14.1 59.34,132.02 D13.A | C17.P$2 66.78,150.16 arc45 66.35,151.2
  Bottom 0.508: 79.03,111.15 79.44,111.56 93.57,111.56 94.46,112.45 S2.P$1
  Bottom 0.61: SOCKET2.4 79.03,111.15 | S2.P$1
  Bottom 0.813: v59.42,130.63 66.62,137.82 arc45 67.37,139.62 67.37,140.93 arc45 66.62,142.73 C18.P$2 arc-45 66.01,143.93 66.01,147.34 arc-90 C17.P$2
GND2  (via drill 0.5)
  Top 0.305: 18.82,98.84 18.85,98.81 | D15.K
  Top 0.406: 18.85,98.81 19.28,99.23 23.75,99.23 24.41,99.89 36.63,99.89 37.01,99.52 37.01,98.44 Q3.2 | D15.K 8.94,95.66 10.21,96.93 10.97,96.93 12.88,98.84 18.82,98.84 | D15.K D21.K
  Top 0.508: U6.2 7.26,63.77 7.51,63.52 9.44,63.52 C25.1 9.46,64.64 C24.1 | v11.92,78.23 11.92,79.71 D20.A
  Top 0.61: 11.51,64.52 11.51,66.52 10.92,67.11 D18.A 9.43,70.09 9.01,70.52 9.01,76.24 C22.1 9.97,78.19 10.4,78.62 10.4,79.56 C23.1 | 11.51,64.52 11.51,59.4 12.01,58.9 45.62,58.9 46.95,60.23 S3.P$1 | C24.1 11.37,64.65 11.51,64.52 | C23.1 10.34,80.64 R18.1 | C23.1 11.84,79.62 D20.A | C26.P$2 19.28,97.76 arc45 18.85,98.81
  Bottom 0.508: 31.53,58.76 31.94,59.16 46.07,59.16 46.96,60.05 S3.P$1
  Bottom 0.61: SOCKET3.4 31.53,58.76 | S3.P$1
  Bottom 0.813: v11.92,78.23 19.12,85.42 arc45 19.87,87.22 19.87,88.53 arc45 19.12,90.33 C27.P$2 arc-45 18.51,91.53 18.51,94.94 arc-90 C26.P$2
GND3  (via drill 0.5)
  Top 0.305: 66.32,98.84 66.35,98.81 | D22.K
  Top 0.406: 66.35,98.81 66.78,99.23 71.25,99.23 71.91,99.89 84.13,99.89 84.51,99.52 84.51,98.44 Q4.2 | D22.K 56.44,95.66 57.71,96.93 58.47,96.93 60.38,98.84 66.32,98.84 | D22.K D28.K
  Top 0.508: U8.2 54.76,63.77 55.01,63.52 56.94,63.52 C34.1 56.96,64.64 C33.1 | v59.42,78.23 59.42,79.71 D27.A
  Top 0.61: 59.01,64.52 59.01,66.52 58.42,67.11 D25.A 56.93,70.09 56.51,70.52 56.51,76.24 C31.1 57.47,78.19 57.9,78.62 57.9,79.56 C32.1 | 59.01,64.52 59.01,59.4 59.51,58.9 93.12,58.9 94.45,60.23 S4.P$1 | C33.1 58.87,64.65 59.01,64.52 | C32.1 57.84,80.64 R25.1 | C32.1 59.34,79.62 D27.A | C35.P$2 66.78,97.76 arc45 66.35,98.81
  Bottom 0.508: 79.03,58.76 79.44,59.16 93.57,59.16 94.46,60.05 S4.P$1
  Bottom 0.61: SOCKET4.4 79.03,58.76 | S4.P$1
  Bottom 0.813: v59.42,78.23 66.62,85.42 arc45 67.37,87.22 67.37,88.53 arc45 66.62,90.33 C36.P$2 arc-45 66.01,91.53 66.01,94.94 arc-90 C35.P$2
GND4  (via drill 0.5)
  Top 0.305: 18.82,45.44 18.85,45.41 | D29.K
  Top 0.406: 18.85,45.41 19.28,45.83 23.75,45.83 24.41,46.49 36.63,46.49 37.01,46.12 37.01,45.04 Q5.2 | D29.K 8.94,42.26 10.21,43.53 10.97,43.53 12.88,45.44 18.82,45.44 | D29.K D35.K
  Top 0.508: U10.2 7.26,10.37 7.51,10.11 9.44,10.11 C43.1 9.46,11.24 C42.1 | v11.92,24.83 11.92,26.31 D34.A
  Top 0.61: 11.51,11.11 11.51,13.11 10.92,13.71 D32.A 9.43,16.69 9.01,17.11 9.01,22.84 C40.1 9.97,24.78 10.4,25.22 10.4,26.16 C41.1 | 11.51,11.11 11.51,6 12.01,5.5 45.62,5.5 46.95,6.83 S5.P$1 | C42.1 11.37,11.25 11.51,11.11 | C41.1 10.34,27.24 R32.1 | C41.1 11.84,26.22 D34.A | C44.P$2 19.28,44.36 arc45 18.85,45.41
  Bottom 0.508: 31.53,5.36 31.94,5.76 46.07,5.76 46.96,6.66 S5.P$1
  Bottom 0.61: SOCKET5.4 31.53,5.36 | S5.P$1
  Bottom 0.813: v11.92,24.83 19.12,32.03 arc45 19.87,33.82 19.87,35.13 arc45 19.12,36.93 C45.P$2 arc-45 18.51,38.13 18.51,41.53 arc-90 C44.P$2
GND5  (via drill 0.5)
  Top 0.305: 66.32,45.44 66.35,45.41 | D36.K
  Top 0.406: 66.35,45.41 66.78,45.83 71.25,45.83 71.91,46.49 84.13,46.49 84.51,46.12 84.51,45.04 Q6.2 | D36.K 56.44,42.26 57.71,43.53 58.47,43.53 60.38,45.44 66.32,45.44 | D36.K D42.K
  Top 0.508: U12.2 54.76,10.37 55.01,10.11 56.94,10.11 C52.1 56.96,11.24 C51.1 | v59.42,24.83 59.42,26.31 D41.A
  Top 0.61: 59.01,11.11 59.01,13.11 58.42,13.71 D39.A 56.93,16.69 56.51,17.11 56.51,22.84 C49.1 57.47,24.78 57.9,25.22 57.9,26.16 C50.1 | 59.01,11.11 59.01,6 59.51,5.5 93.12,5.5 94.45,6.83 S6.P$1 | C51.1 58.87,11.25 59.01,11.11 | C50.1 57.84,27.24 R39.1 | C50.1 59.34,26.22 D41.A | C53.P$2 66.78,44.36 arc45 66.35,45.41
  Bottom 0.508: SOCKET6.4 79.03,5.36 79.44,5.76 93.57,5.76 94.46,6.66 S6.P$1
  Bottom 0.61: S6.P$1
  Bottom 0.813: v59.42,24.83 66.62,32.03 arc45 67.37,33.82 67.37,35.13 arc45 66.62,36.93 C54.P$2 arc-45 66.01,38.13 66.01,41.53 arc-90 C53.P$2
GPIO0
  Bottom 0.203: SOCKET1.5 48.55,110.64 S1.P$3
GPIO1  (via drill 0.3)
  Top 0.203: v57.33,107.8 61.14,107.8 v63.68,110.34
  Bottom 0.203: R13.2 55.99,143.8 55.99,143.67 55.17,142.86 55.17,140.32 54.15,139.3 54.15,125.08 54.66,124.57 54.66,110.47 v57.33,107.8 | 64.57,111.23 v63.68,110.34 64.69,111.36 73.4,111.36 73.95,110.8 SOCKET2.2
GPIO2
  Bottom 0.203: SOCKET2.5 96.06,110.56 S2.P$3
GPIO3  (via drill 0.3)
  Top 0.203: v9.82,107.89 13.63,107.89 v16.17,110.43
  Bottom 0.203: R9.2 8.48,143.88 8.48,143.76 7.66,142.94 7.66,140.4 6.64,139.38 6.64,125.16 7.15,124.65 7.15,110.56 v9.82,107.89 | 17.06,111.32 v16.17,110.43 17.18,111.44 25.89,111.44 26.44,110.89 SOCKET1.2
GPIO4  (via drill 0.3)
  Top 0.203: v9.83,55.4 13.64,55.4 v16.18,57.94
  Bottom 0.203: R20.2 8.49,91.4 8.49,91.27 7.67,90.46 7.67,87.92 6.65,86.9 6.65,72.68 7.16,72.17 7.16,58.07 v9.83,55.4 | 17.07,58.83 v16.18,57.94 17.19,58.95 25.9,58.95 26.45,58.4 SOCKET3.2
GPIO5
  Bottom 0.203: SOCKET3.5 48.56,58.16 S3.P$3
GPIO6  (via drill 0.3)
  Top 0.203: v57.33,55.4 61.14,55.4 v63.68,57.94
  Bottom 0.203: R27.2 55.99,91.4 55.99,91.27 55.17,90.46 55.17,87.92 54.15,86.9 54.15,72.68 54.66,72.17 54.66,58.07 v57.33,55.4 | 64.57,58.83 v63.68,57.94 64.69,58.95 73.4,58.95 73.95,58.4 SOCKET4.2
GPIO7
  Bottom 0.203: SOCKET4.5 96.06,58.16 S4.P$3
GPIO8  (via drill 0.3)
  Top 0.203: v9.83,2 13.64,2 v16.18,4.54
  Bottom 0.203: R34.2 8.49,38 8.49,37.87 7.67,37.06 7.67,34.52 6.65,33.5 6.65,19.28 7.16,18.77 7.16,4.67 v9.83,2 | 17.07,5.43 v16.18,4.54 17.19,5.56 25.9,5.56 26.45,5 SOCKET5.2
GPIO9
  Bottom 0.203: SOCKET5.5 48.56,4.75 S5.P$3
GPIO10  (via drill 0.3)
  Top 0.203: v57.33,2 61.14,2 v63.68,4.54
  Bottom 0.203: R41.2 55.99,38 55.99,37.87 55.17,37.06 55.17,34.52 54.15,33.5 54.15,19.28 54.66,18.77 54.66,4.67 v57.33,2 | 64.57,5.43 v63.68,4.54 64.69,5.56 73.4,5.56 73.95,5 SOCKET6.2
GPIO11
  Bottom 0.203: SOCKET6.5 96.06,4.75 S6.P$3
L_IN
  Bottom 0.61: RF1.P$1 39.04,131.54 40.5,133 40.5,135.38 RE1.3
  Bottom 1.27: RE1.3 41.24,136.26 40.5,137 40.5,142 33.5,149 31.55,149 R10.P$2
  Bottom 3.454: RE1.3 43.06,134.58 L_IN.1
  pour Bottom (isolate 0.152, no thermals): 39.84,128.51 40.48,129.52 45.34,126.6 45.44,126.46 44.32,124.61 39.23,127.49
L_IN1
  Bottom 0.61: RF2.P$1 86.55,131.46 88.01,132.91 88.01,135.29 RE2.3
  Bottom 1.27: RE2.3 88.75,136.18 88.01,136.91 88.01,141.91 81.01,148.91 79.06,148.91 R14.P$2
  Bottom 3.454: RE2.3 90.58,134.5 L_IN1.1
  pour Bottom (isolate 0.152, no thermals): 87.35,128.42 87.99,129.43 92.85,126.51 92.95,126.37 91.83,124.52 86.74,127.41
L_IN2
  Bottom 0.61: RF3.P$1 39.05,79.06 40.51,80.52 40.51,82.89 RE3.3
  Bottom 1.27: RE3.3 41.25,83.78 40.51,84.52 40.51,89.52 33.51,96.52 31.57,96.52 R21.P$2
  Bottom 3.454: RE3.3 43.08,82.1 L_IN2.1
  pour Bottom (isolate 0.152, no thermals): 39.95,76.02 40.59,77.03 45.35,74.11 45.45,73.97 44.43,72.12 39.34,75.01
L_IN3
  Bottom 0.61: RF4.P$1 86.55,79.06 88.01,80.52 88.01,82.89 RE4.3
  Bottom 1.27: RE4.3 88.75,83.78 88.01,84.52 88.01,89.52 81.01,96.52 79.06,96.52 R28.P$2
  Bottom 3.454: RE4.3 90.58,82.1 L_IN3.1
  pour Bottom (isolate 0.152, no thermals): 87.65,76.62 87.89,76.93 92.85,74.11 92.85,74.07 91.83,72.22 86.74,75.11
L_IN4
  Bottom 0.61: RF5.P$1 39.05,25.66 40.51,27.11 40.51,29.49 RE5.3
  Bottom 1.27: RE5.3 41.25,30.38 40.51,31.11 40.51,36.11 33.51,43.12 31.57,43.12 R35.P$2
  Bottom 3.454: RE5.3 43.08,28.7 L_IN4.1
  pour Bottom (isolate 0.152, no thermals): 39.85,22.62 40.49,23.63 45.35,20.71 45.45,20.57 44.33,18.72 39.24,21.61
L_IN5
  Bottom 0.61: RF6.P$1 86.55,25.66 88.01,27.11 88.01,29.49 RE6.3
  Bottom 1.27: RE6.3 88.75,30.38 88.01,31.11 88.01,36.11 81.01,43.12 79.06,43.12 R42.P$2
  Bottom 3.454: RE6.3 90.58,28.7 L_IN5.1
  pour Bottom (isolate 0.152, no thermals): 87.35,22.62 87.99,23.63 92.85,20.71 92.95,20.57 91.83,18.72 86.74,21.61
L_OUT
  Bottom 3.454: L_OUT.1 46.61,118 arc90 48.96,120.35 48.96,133.69 RE1.4
  pour Bottom (isolate 0.152, no thermals): 43.55,120.43 45.51,120.43 46.04,119.7 46.01,116.26 45.49,115.55 43.54,115.56
L_OUT1
  Bottom 3.454: L_OUT1.1 94.12,117.91 arc90 96.47,120.26 96.47,133.61 RE2.4
  pour Bottom (isolate 0.152, no thermals): 91.06,120.35 93.02,120.34 93.55,119.61 93.52,116.17 93,115.46 91.05,115.48
L_OUT2
  Bottom 3.454: L_OUT2.1 46.62,65.52 arc90 48.97,67.86 48.97,81.21 RE3.4
  pour Bottom (isolate 0.152, no thermals): 43.66,67.95 45.52,67.94 46.05,67.22 46.02,63.77 45.5,63.06 43.65,63.08
L_OUT3
  Bottom 3.454: L_OUT3.1 94.12,65.52 arc90 96.47,67.86 96.47,81.21 RE4.4
  pour Bottom (isolate 0.152, no thermals): 91.06,68.05 93.02,68.04 93.55,67.22 93.52,63.77 93,63.16 91.05,63.18
L_OUT4
  Bottom 3.454: L_OUT4.1 46.62,12.11 arc90 48.97,14.46 48.97,27.81 RE5.4
  pour Bottom (isolate 0.152, no thermals): 43.56,14.55 45.52,14.54 46.05,13.81 46.02,10.37 45.5,9.66 43.55,9.68
L_OUT5
  Bottom 3.454: L_OUT5.1 94.12,12.11 arc90 96.47,14.46 96.47,27.81 RE6.4
  pour Bottom (isolate 0.152, no thermals): 91.06,14.55 93.02,14.54 93.55,13.81 93.52,10.37 93,9.66 91.05,9.68
N  (via drill 0.5, 0.8)
  Top 0.406: D4.C 10.88,126.38
  Top 0.61: 10.88,126.38 v12.5,128
  Top 1.27: R10.P$1 arc-90 24.23,147.17 22.91,147.17 arc90 21.59,145.85 21.59,144.47 arc90 21.78,144.28 21.78,144.24 arc90 21.95,144.07 v21.95,139.88
  Bottom 0.61: v12.5,128 14.22,128 14.86,127.36
  Bottom 0.813: 11.81,118.69 12.5,118 N.1
  Bottom 1.27: 21.95,139.68 v21.95,139.88 22.25,139.3 22.2,132.93 arc-60 20.9,130.74 14.86,127.36 11.84,125.67 11.84,125.46 11.81,125.44 11.81,118.69
  pour Bottom (isolate 0.152, no thermals): 12.11,120.42 15.43,122.23 16.03,121.22 14.72,120.42 14.43,120.23 14.43,115.56 12.16,115.55 12.14,119.78
N1  (via drill 0.5, 0.8)
  Top 0.406: D11.C 58.39,126.29
  Top 0.61: 58.39,126.29 v60.01,127.91
  Top 1.27: R14.P$1 arc-90 71.73,147.09 70.42,147.09 arc90 69.1,145.76 69.1,144.38 arc90 69.29,144.19 69.29,144.15 arc90 69.46,143.99 v69.46,139.8
  Bottom 0.61: v60.01,127.91 61.73,127.91 62.37,127.27
  Bottom 0.813: 59.32,118.6 60.01,117.91 N1.1
  Bottom 1.27: 69.46,139.59 v69.46,139.8 69.76,139.21 69.71,132.85 arc-60 68.41,130.65 62.37,127.27 59.34,125.58 59.34,125.38 59.32,125.36 59.32,118.6
  pour Bottom (isolate 0.152, no thermals): 59.62,120.33 62.94,122.15 63.54,121.14 62.23,120.34 61.94,120.15 61.94,115.48 59.67,115.47 59.65,119.69
N2  (via drill 0.5, 0.8)
  Top 0.406: D18.C 10.89,73.89
  Top 0.61: 10.89,73.89 v12.51,75.52
  Top 1.27: R21.P$1 arc-90 24.23,94.69 22.92,94.69 arc90 21.6,93.36 21.6,91.98 arc90 21.79,91.79 21.79,91.75 arc90 21.96,91.59 v21.96,87.39
  Bottom 0.61: v12.51,75.52 14.23,75.52 14.87,74.87
  Bottom 0.813: 11.82,66.2 12.51,65.52 N2.1
  Bottom 1.27: 21.96,87.19 v21.96,87.39 22.26,86.81 22.21,80.45 arc-60 20.91,78.25 14.87,74.87 11.84,73.18 11.84,72.98 11.82,72.95 11.82,66.2
  pour Bottom (isolate 0.152, no thermals): 12.22,67.93 15.54,69.75 16.14,68.74 14.83,67.94 14.54,67.75 14.54,63.08 12.17,63.07 12.15,67.29
N3  (via drill 0.5, 0.8)
  Top 0.406: D25.C 58.39,73.89
  Top 0.61: 58.39,73.89 v60.01,75.52
  Top 1.27: R28.P$1 arc-90 71.73,94.69 70.42,94.69 arc90 69.1,93.36 69.1,91.98 arc90 69.29,91.79 69.29,91.75 arc90 69.46,91.59 v69.46,87.39
  Bottom 0.61: v60.01,75.52 61.73,75.52 62.37,74.87
  Bottom 0.813: 59.32,66.2 60.01,65.52 N3.1
  Bottom 1.27: 69.46,87.19 v69.46,87.39 69.76,86.81 69.71,80.45 arc-60 68.41,78.25 62.37,74.87 59.34,73.18 59.34,72.98 59.32,72.95 59.32,66.2
  pour Bottom (isolate 0.152, no thermals): 59.62,68.03 62.94,69.85 63.54,68.84 62.23,68.04 61.94,67.85 61.94,63.18 59.67,63.17 59.65,67.29
N4  (via drill 0.5, 0.8)
  Top 0.406: D32.C 10.89,20.49
  Top 0.61: 10.89,20.49 v12.51,22.11
  Top 1.27: R35.P$1 arc-90 24.23,41.28 22.92,41.28 arc90 21.6,39.96 21.6,38.58 arc90 21.79,38.39 21.79,38.35 arc90 21.96,38.19 v21.96,34
  Bottom 0.61: v12.51,22.11 14.23,22.11 14.87,21.47
  Bottom 0.813: 11.82,12.8 12.51,12.11 N4.1
  Bottom 1.27: 21.96,33.79 v21.96,34 22.26,33.41 22.21,27.05 arc-60 20.91,24.85 14.87,21.47 11.84,19.78 11.84,19.58 11.82,19.56 11.82,12.8
  pour Bottom (isolate 0.152, no thermals): 12.12,14.53 15.44,16.35 16.04,15.34 14.73,14.54 14.44,14.35 14.44,9.68 12.17,9.67 12.15,13.89
N5  (via drill 0.5, 0.8)
  Top 0.406: D39.C 58.39,20.49
  Top 0.61: 58.39,20.49 v60.01,22.11
  Top 1.27: R42.P$1 arc-90 71.73,41.28 70.42,41.28 arc90 69.1,39.96 69.1,38.58 arc90 69.29,38.39 69.29,38.35 arc90 69.46,38.19 v69.46,34
  Bottom 0.61: v60.01,22.11 61.73,22.11 62.37,21.47
  Bottom 0.813: 59.32,12.8 60.01,12.11 N5.1
  Bottom 1.27: 69.46,33.79 v69.46,34 69.76,33.41 69.71,27.05 arc-60 68.41,24.85 62.37,21.47 59.34,19.78 59.34,19.58 59.32,19.56 59.32,12.8
  pour Bottom (isolate 0.152, no thermals): 59.62,14.53 62.94,16.35 63.54,15.34 62.23,14.54 61.94,14.35 61.94,9.68 59.67,9.67 59.65,13.89
N$1
  Bottom 0.203: D8.A 53.9,147.87 R1.1
N$2
  Top 0.254: 43,151.5 43,151.8 D2.2
  Top 0.406: Q1.3 41.14,148.71 RE1.2
  Top 1.27: RE1.2 41.39,150.25 D2.2
N$3
  Top 0.61: D3.C 37.56,143.94 36.5,145 36.5,147 35.5,148 35.29,148 32.73,150.56 23.58,150.58 22.48,149.48 arc45 C3.P$1
  Bottom 0.813: L1.P$1 arc-45 15.47,149.35 16.06,149.94 arc-45 17.85,150.69 20.1,150.69 arc-45 21.75,150.01 C3.P$1
N$4
  Bottom 0.203: D1.A 6.39,147.96 R2.1
N$5
  Top 1.524: L1.P$2 11.8,146.13 11.34,145.67 U1.5
  Bottom 1.27: L1.P$2 14.94,144.34 15.26,144.03 16.02,143.27 arc-45 16.76,141.47 C4.P$1
N$6
  Top 0.406: 13.18,136.85 C1.2
  Top 0.508: D6.C 12.69,135.59 | C1.2
  Top 0.61: U1.4 U1.3 C2.1 arc-31 C7.2 R4.2 C1.2 | 13.18,136.08 C1.2
  Top 0.813: 12.69,135.59 13.18,136.08 19.44,136.08 L2.P$1
N$7
  Top 0.61: RF1.P$2 37.58,138.1 D3.A
N$8
  Top 0.254: 90.51,151.41 90.51,151.71 D9.2
  Top 0.406: Q2.3 88.65,148.63 RE2.2
  Top 1.27: RE2.2 88.9,150.17 D9.2
N$9
  Top 0.61: D10.C 85.08,143.85 84.01,144.91 84.01,146.91 83.01,147.91 82.8,147.91 80.24,150.48 71.09,150.5 69.99,149.4 arc45 C17.P$1
  Bottom 0.813: L4.P$1 arc-45 62.98,149.27 63.57,149.86 arc-45 65.36,150.6 67.61,150.6 arc-45 69.26,149.92 C17.P$1
N$10
  Top 0.356: U1.1 11.35,140.23 arc90 C2.2
N$11
  Top 0.356: R5.2 12.02,138.8 arc90 C7.1 | R4.1 arc90 R4.1 | R4.1 C7.1 | C7.1 arc90 12.5,139.28 12.5,140.6 arc-45 12.3,141.09 U1.2
  Top 0.406: 12.05,138.88 C7.1
N$12
  Top 0.356: R5.1 arc90 11.74,137.01 C1.1
  Top 0.406: C1.1 12.03,137.01 | R5.1 9.35,137.7 9.06,137.99 8.41,137.99 D5.C
N$13
  Top 0.61: U2.3 6.3,118.87 R8.1
N$14
  Bottom 0.203: 6.79,143.67 R9.1 6.39,143.47 D7.A
N$15
  Top 1.524: L4.P$2 59.31,146.04 58.85,145.58 U3.5
  Bottom 1.27: L4.P$2 62.45,144.25 62.77,143.94 63.52,143.18 arc-45 64.27,141.38 C18.P$1
N$16
  Top 0.406: 60.69,136.76 C11.2
  Top 0.508: D13.C 60.2,135.5 | C11.2
  Top 0.61: U3.4 U3.3 C10.1 arc-31 C12.2 R3.2 C11.2 | 60.69,136 C11.2
  Top 0.813: 60.2,135.5 60.69,136 66.95,136 L3.P$1
N$17
  Top 0.61: RF2.P$2 85.09,138.01 D10.A
N$18
  Top 0.356: U3.1 58.86,140.14 arc90 C10.2
N$19
  Top 0.356: R7.2 59.52,138.71 arc90 C12.1 | R3.1 arc90 R3.1 | R3.1 C12.1 | C12.1 arc90 60.01,139.2 60.01,140.51 arc-45 59.81,141 U3.2
  Top 0.406: 59.56,138.8 C12.1
N$20
  Top 0.356: R7.1 arc90 59.26,136.92 C11.1
  Top 0.406: C11.1 59.54,136.92 | R7.1 56.86,137.61 56.57,137.9 55.92,137.9 D12.C
N$21
  Top 0.61: U4.3 53.8,118.78 R12.1
N$22
  Bottom 0.203: 54.3,143.58 R13.1 53.9,143.38 D14.A
N$23
  Bottom 0.203: D15.A 6.4,95.47 R15.1
N$24
  Top 0.254: 43.01,99.02 43.01,99.31 D16.2
  Top 0.406: Q3.3 41.15,96.23 RE3.2
  Top 1.27: RE3.2 41.4,97.77 D16.2
N$25
  Top 0.61: D17.C 37.58,91.45 36.51,92.52 36.51,94.52 35.51,95.52 35.3,95.52 32.74,98.08 23.59,98.1 22.49,97 arc45 C26.P$1
  Bottom 0.813: L6.P$1 arc-45 15.48,96.87 16.07,97.46 arc-45 17.87,98.2 20.12,98.2 arc-45 21.76,97.52 C26.P$1
N$26
  Top 1.524: L6.P$2 11.81,93.64 11.35,93.18 U5.5
  Bottom 1.27: L6.P$2 14.95,91.86 16.02,90.78 arc-45 16.77,88.98 C27.P$1
N$27
  Top 0.406: 13.19,84.36 C20.2
  Top 0.508: D20.C 12.7,83.1 | C20.2
  Top 0.61: U5.4 U5.3 C19.1 arc-31 C21.2 R16.2 C20.2 | 13.19,83.6 C20.2
  Top 0.813: 12.7,83.1 13.19,83.6 19.45,83.6 L5.P$1
N$28
  Top 0.61: RF3.P$2 37.59,85.61 D17.A
N$29
  Top 0.356: U5.1 11.36,87.74 arc90 C19.2
N$30
  Top 0.356: R17.2 12.02,86.31 arc90 C21.1 | R16.1 arc90 R16.1 | R16.1 C21.1 | C21.1 arc90 12.51,86.8 12.51,88.11 arc-45 12.31,88.6 U5.2
  Top 0.406: 12.06,86.39 C21.1
N$31
  Top 0.356: R17.1 arc90 11.76,84.52 C20.1
  Top 0.406: C20.1 12.04,84.52 | R17.1 9.36,85.21 9.07,85.5 8.42,85.5 D19.C
N$32
  Top 0.61: U6.3 6.3,66.38 R19.1
N$33
  Bottom 0.203: 6.8,91.18 R20.1 6.4,90.98 D21.A
N$34
  Bottom 0.203: D22.A 53.9,95.47 R22.1
N$35
  Top 0.254: 90.51,99.02 90.51,99.31 D23.2
  Top 0.406: Q4.3 88.65,96.23 RE4.2
  Top 1.27: RE4.2 88.9,97.77 D23.2
N$36
  Top 0.61: D24.C 85.08,91.45 84.01,92.52 84.01,94.52 83.01,95.52 82.8,95.52 80.24,98.08 71.09,98.1 69.99,97 arc45 C35.P$1
  Bottom 0.813: L8.P$1 arc-45 62.98,96.87 63.57,97.46 arc-45 65.36,98.2 67.61,98.2 arc-45 69.26,97.52 C35.P$1
N$37
  Top 1.524: L8.P$2 59.31,93.64 58.85,93.18 U7.5
  Bottom 1.27: L8.P$2 62.45,91.86 63.52,90.78 arc-45 64.27,88.98 C36.P$1
N$38
  Top 0.406: 60.69,84.36 C29.2
  Top 0.508: D27.C 60.2,83.1 | C29.2
  Top 0.61: U7.4 U7.3 C28.1 arc-31 C30.2 R23.2 C29.2 | 60.69,83.6 C29.2
  Top 0.813: 60.2,83.1 60.69,83.6 66.95,83.6 L7.P$1
N$39
  Top 0.61: RF4.P$2 85.09,85.61 D24.A
N$40
  Top 0.356: U7.1 58.86,87.74 arc90 C28.2
N$41
  Top 0.356: R24.2 59.52,86.31 arc90 C30.1 | R23.1 arc90 R23.1 | R23.1 C30.1 | C30.1 arc90 60.01,86.8 60.01,88.11 arc-45 59.81,88.6 U7.2
  Top 0.406: 59.56,86.39 C30.1
N$42
  Top 0.356: R24.1 arc90 59.26,84.52 C29.1
  Top 0.406: C29.1 59.54,84.52 | R24.1 56.86,85.21 56.57,85.5 55.92,85.5 D26.C
N$43
  Top 0.61: U8.3 53.8,66.38 R26.1
N$44
  Bottom 0.203: 54.3,91.18 R27.1 53.9,90.98 D28.A
N$45
  Bottom 0.203: D29.A 6.4,42.07 R29.1
N$46
  Top 0.254: 43.01,45.62 43.01,45.91 D30.2
  Top 0.406: Q5.3 41.15,42.83 RE5.2
  Top 1.27: RE5.2 41.4,44.37 D30.2
N$47
  Top 0.61: D31.C 37.58,38.05 36.51,39.11 36.51,41.11 35.51,42.12 35.3,42.12 32.74,44.68 23.59,44.7 22.49,43.59 arc45 C44.P$1
  Bottom 0.813: L10.P$1 arc-45 15.48,43.47 16.07,44.06 arc-45 17.87,44.8 20.12,44.8 arc-45 21.76,44.12 C44.P$1
N$48
  Top 1.524: L10.P$2 11.81,40.24 11.35,39.78 U9.5
  Bottom 1.27: L10.P$2 14.95,38.45 15.27,38.14 16.02,37.38 arc-45 16.77,35.58 C45.P$1
N$49
  Top 0.406: 13.19,30.96 C38.2
  Top 0.508: D34.C 12.7,29.7 | C38.2
  Top 0.61: U9.4 U9.3 C37.1 arc-31 C39.2 R30.2 C38.2 | 13.19,30.2 C38.2
  Top 0.813: 12.7,29.7 13.19,30.2 19.45,30.2 L9.P$1
N$50
  Top 0.61: RF5.P$2 37.59,32.21 D31.A
N$51
  Top 0.356: U9.1 11.36,34.34 arc90 C37.2
N$52
  Top 0.356: R31.2 12.02,32.91 arc90 C39.1 | R30.1 arc90 R30.1 | R30.1 C39.1 | C39.1 arc90 12.51,33.4 12.51,34.72 arc-45 12.31,35.2 U9.2
  Top 0.406: 12.06,33 C39.1
N$53
  Top 0.356: R31.1 arc90 11.76,31.12 C38.1
  Top 0.406: C38.1 12.04,31.12 | R31.1 9.36,31.81 9.07,32.1 8.42,32.1 D33.C
N$54
  Top 0.61: U10.3 6.3,12.98 R33.1
N$55
  Bottom 0.203: 6.8,37.78 R34.1 6.4,37.58 D35.A
N$56
  Bottom 0.203: D36.A 53.9,42.07 R36.1
N$57
  Top 0.254: 90.51,45.62 90.51,45.91 D37.2
  Top 0.406: Q6.3 88.65,42.83 RE6.2
  Top 1.27: RE6.2 88.9,44.37 D37.2
N$58
  Top 0.61: D38.C 85.08,38.05 84.01,39.11 84.01,41.11 83.01,42.12 82.8,42.12 80.24,44.68 71.09,44.7 69.99,43.59 arc45 C53.P$1
  Bottom 0.813: L12.P$1 arc-45 62.98,43.47 63.57,44.06 arc-45 65.36,44.8 67.61,44.8 arc-45 69.26,44.12 C53.P$1
N$59
  Top 1.524: L12.P$2 59.31,40.24 58.85,39.78 U11.5
  Bottom 1.27: L12.P$2 62.45,38.45 62.77,38.14 63.52,37.38 arc-45 64.27,35.58 C54.P$1
N$60
  Top 0.406: 60.69,30.96 C47.2
  Top 0.508: D41.C 60.2,29.7 | C47.2
  Top 0.61: U11.4 U11.3 C46.1 arc-31 C48.2 R37.2 C47.2 | 60.69,30.2 C47.2
  Top 0.813: 60.2,29.7 60.69,30.2 66.95,30.2 L11.P$1
N$61
  Top 0.61: RF6.P$2 85.09,32.21 D38.A
N$62
  Top 0.356: U11.1 58.86,34.34 arc90 C46.2
N$63
  Top 0.356: R38.2 59.52,32.91 arc90 C48.1 | R37.1 arc90 R37.1 | R37.1 C48.1 | C48.1 arc90 60.01,33.4 60.01,34.72 arc-45 59.81,35.2 U11.2
  Top 0.406: 59.56,33 C48.1
N$64
  Top 0.356: R38.1 arc90 59.26,31.12 C47.1
  Top 0.406: C47.1 59.54,31.12 | R38.1 56.86,31.81 56.57,32.1 55.92,32.1 D40.C
N$65
  Top 0.61: U12.3 53.8,12.98 R40.1
N$66
  Bottom 0.203: 54.3,37.78 R41.1 53.9,37.58 D42.A
RELAY  (via drill 0.5)
  Top 0.254: Q1.1 38.5,151.33 38.5,152 37.5,153 23.5,153 22.91,152.41 18.44,152.41 17.88,152.97 12.99,152.97 10.52,150.5 v10.5,150.5
  Bottom 0.203: 9.75,149.75 v10.5,150.5 | R2.2 10.33,149.04 10.33,146.37 9.82,145.86 9.82,142.56 10.2,142.18 10.2,141.04 9.44,140.27 8.17,140.27 7.84,139.95 7.84,139.93 7.15,139.24 7.15,137.18 7.15,125.42 7.66,124.91 7.66,110.81 9.82,108.65
  Bottom 0.254: R2.2 9.75,149.75
  Bottom 0.406: 9.82,108.65 17.06,108.65
  Bottom 0.61: 17.06,108.65 17.33,108.65 17.73,108.26 SOCKET1.10
RELAY1  (via drill 0.5)
  Top 0.254: Q2.1 86.01,151.24 86.01,151.91 85.01,152.91 71.01,152.91 70.42,152.33 65.94,152.33 65.39,152.89 60.5,152.89 58.03,150.41 v58.01,150.41
  Bottom 0.203: 57.26,149.66 v58.01,150.41 | R1.2 57.84,148.95 57.84,146.28 57.33,145.78 57.33,142.47 57.71,142.09 57.71,140.95 56.95,140.19 55.68,140.19 55.35,139.86 55.35,139.85 54.66,139.15 54.66,137.1 54.66,125.33 55.17,124.82 55.17,110.72 57.33,108.57
  Bottom 0.254: R1.2 57.26,149.66
  Bottom 0.406: 57.33,108.57 64.57,108.57
  Bottom 0.61: 64.57,108.57 64.84,108.57 65.23,108.17 SOCKET2.10
RELAY2  (via drill 0.5)
  Top 0.254: Q3.1 38.51,98.84 38.51,99.52 37.51,100.52 23.51,100.52 22.93,99.93 18.45,99.93 17.89,100.49 13,100.49 10.53,98.02 v10.51,98.02
  Bottom 0.203: 9.76,97.26 v10.51,98.02 | R15.2 10.34,96.55 10.34,93.89 9.83,93.38 9.83,90.08 10.21,89.69 10.21,88.55 9.45,87.79 8.18,87.79 7.85,87.46 7.85,87.45 7.16,86.75 7.16,84.7 7.16,72.93 7.67,72.42 7.67,58.33 9.83,56.17
  Bottom 0.254: R15.2 9.76,97.26
  Bottom 0.406: 9.83,56.17 17.07,56.17
  Bottom 0.61: 17.07,56.17 17.34,56.17 17.73,55.77 SOCKET3.10
RELAY3  (via drill 0.5)
  Top 0.254: Q4.1 86.01,98.84 86.01,99.52 85.01,100.52 71.01,100.52 70.42,99.93 65.94,99.93 65.39,100.49 60.5,100.49 58.03,98.02 v58.01,98.02
  Bottom 0.203: 57.26,97.26 v58.01,98.02 | R22.2 57.84,96.55 57.84,93.89 57.33,93.38 57.33,90.08 57.71,89.69 57.71,88.55 56.95,87.79 55.68,87.79 55.35,87.46 55.35,87.45 54.66,86.75 54.66,84.7 54.66,72.93 55.17,72.42 55.17,58.33 57.33,56.17
  Bottom 0.254: R22.2 57.26,97.26
  Bottom 0.406: 57.33,56.17 64.57,56.17
  Bottom 0.61: 64.57,56.17 64.84,56.17 65.23,55.77 SOCKET4.10
RELAY4  (via drill 0.5)
  Top 0.254: Q5.1 38.51,45.44 38.51,46.12 37.51,47.12 23.51,47.12 22.93,46.53 18.45,46.53 17.89,47.09 13,47.09 10.53,44.62 v10.51,44.62
  Bottom 0.203: 9.76,43.86 v10.51,44.62 | R29.2 10.34,43.15 10.34,40.48 9.83,39.98 9.83,36.67 10.21,36.29 10.21,35.15 9.45,34.39 8.18,34.39 7.85,34.06 7.85,34.05 7.16,33.35 7.16,31.3 7.16,19.53 7.67,19.02 7.67,4.92 9.83,2.77
  Bottom 0.254: R29.2 9.76,43.86
  Bottom 0.406: 9.83,2.77 17.07,2.77
  Bottom 0.61: 17.07,2.77 17.34,2.77 17.73,2.38 SOCKET5.10
RELAY5  (via drill 0.5)
  Top 0.254: Q6.1 86.01,45.44 86.01,46.12 85.01,47.12 71.01,47.12 70.42,46.53 65.94,46.53 65.39,47.09 60.5,47.09 58.03,44.62 v58.01,44.62
  Bottom 0.203: 57.26,43.86 v58.01,44.62 | R36.2 57.84,43.15 57.84,40.48 57.33,39.98 57.33,36.67 57.71,36.29 57.71,35.15 56.95,34.39 55.68,34.39 55.35,34.06 55.35,34.05 54.66,33.35 54.66,31.3 54.66,19.53 55.17,19.02 55.17,4.92 57.33,2.77
  Bottom 0.254: R36.2 57.26,43.86
  Bottom 0.406: 57.33,2.77 64.57,2.77
  Bottom 0.61: 64.57,2.77 64.84,2.77 65.23,2.38 SOCKET6.10

## Text on the board
Top: OpenPlug | OpenPlug | OpenPlug | OpenPlug | OpenPlug | OpenPlug
tPlace: C2 | C2 | R5 | C7 | R5 | C7 | R4 | R4 | C1 | C1 | R6 | R6 | C6 | C6 | + | + | C5 | C5 | http://noduino.org | http://noduino.org | 3V3 | 3V3 | RX | TX | GND | IO0 | RX | TX | GND | IO0 | By Jack Tan V0.8 | By Jack Tan V0.8 | 12 | 13 | 14 | 4 | 5 | 12 | 13 | 14 | 4 | 5 | R5 | C2 | C7 | R5 | C2 | C7 | R4 | R4 | C1 | C1 | R6 | R6 | C6 | C6 | + | + | C5 | C5 | http://noduino.org | http://noduino.org | 3V3 | RX | 3V3 | RX | TX | GND | IO0 | TX | GND | IO0 | By Jack Tan V0.8 | 12 | 13 | 14 | 4 | 5 | By Jack Tan V0.8 | 12 | 13 | 14 | 4 | 5 | C2 | C2 | R5 | C7 | R5 | C7 | R4 | R4 | C1 | C1 | R6 | R6 | C6 | C6 | + | + | C5 | C5 | http://noduino.org | http://noduino.org | 3V3 | 3V3 | RX | TX | GND | IO0 | RX | TX | GND | IO0 | By Jack Tan V0.8 | By Jack Tan V0.8 | 12 | 13 | 14 | 4 | 5 | 12 | 13 | 14 | 4 | 5
bPlace: OpenPlug | OpenPlug | http://noduino.org | http://noduino.org | By Jack Tan V0.8 | By Jack Tan V0.8 | 3V3 | 3V3 | RX | TX | GND | IO0 | RX | TX | GND | IO0 | 12 | 13 | 14 | 4 | 5 | 12 | 13 | 14 | 4 | 5 | OpenPlug | OpenPlug | http://noduino.org | http://noduino.org | By Jack Tan V0.8 | By Jack Tan V0.8 | 3V3 | RX | TX | GND | IO0 | 3V3 | RX | TX | GND | IO0 | 12 | 13 | 14 | 4 | 5 | 12 | 13 | 14 | 4 | 5 | OpenPlug | OpenPlug | http://noduino.org | http://noduino.org | By Jack Tan V0.8 | By Jack Tan V0.8 | 3V3 | 3V3 | RX | TX | GND | IO0 | RX | TX | GND | IO0 | 12 | 12 | 13 | 14 | 4 | 5 | 13 | 14 | 4 | 5
_tPlace: R10 | R10 | L1 | C3 | L1 | C3 | C4 | C4 | L2 | L2 | RF1 | RF1 | R10 | R10 | C3 | C3 | L1 | L1 | C4 | C4 | L2 | L2 | RF1 | RF1 | R10 | R10 | L1 | C3 | L1 | C3 | C4 | C4 | L2 | L2 | RF1 | RF1
_tNames: D2 | D2 | Q1 | Q1 | D1 | D1 | U1 | RE1 | U1 | RE1 | D3 | D3 | D7 | D7 | D5 | C7 | C2 | D5 | C7 | C2 | R4 | R4 | R5 | C1 | R5 | C1 | D6 | D6 | R6 | R6 | C6 | C6 | D4 | D4 | R8 | R8 | C8 | C8 | C9 | C9 | U2 | U2 | SOCKET1 | SOCKET1 | D2 | D2 | Q1 | Q1 | D1 | D1 | U1 | U1 | RE1 | RE1 | D3 | D3 | D7 | D7 | D5 | C7 | C2 | D5 | C7 | C2 | R4 | R4 | R5 | C1 | R5 | C1 | D6 | D6 | R6 | R6 | C6 | C6 | D4 | D4 | R8 | R8 | C8 | C9 | C8 | C9 | U2 | U2 | SOCKET1 | SOCKET1 | D2 | D2 | D1 | Q1 | D1 | Q1 | U1 | RE1 | U1 | RE1 | D3 | D3 | D7 | D7 | C2 | C2 | D5 | C7 | D5 | C7 | R4 | R4 | R5 | C1 | R5 | C1 | D6 | D6 | R6 | R6 | C6 | C6 | D4 | D4 | R8 | R8 | C8 | C8 | C9 | C9 | U2 | U2 | SOCKET1 | SOCKET1
_bNames: R2 | R2 | R9 | R9 | L_IN | L_IN | N | L_OUT | N | L_OUT | S1 | S1 | R2 | R2 | R9 | R9 | L_IN | L_IN | N | L_OUT | N | L_OUT | S1 | S1 | R2 | R2 | R9 | R9 | L_IN | L_IN | N | L_OUT | N | L_OUT | S1 | S1